# Altium PCB PCB1.PcbDoc (part 3 of 3)
Units mil, origin at the board's own origin, x right, y up, seen from the top; angles counter-clockwise.
Board outline 8600 x 11100 mil, 4 copper layers (CAPA1, GND, VCC, Capa2), stack 94.024 mil thick; 162 components, 68 nets, 413 pads, 138 vias.
Unrouted connection lines stored in the file: 33.
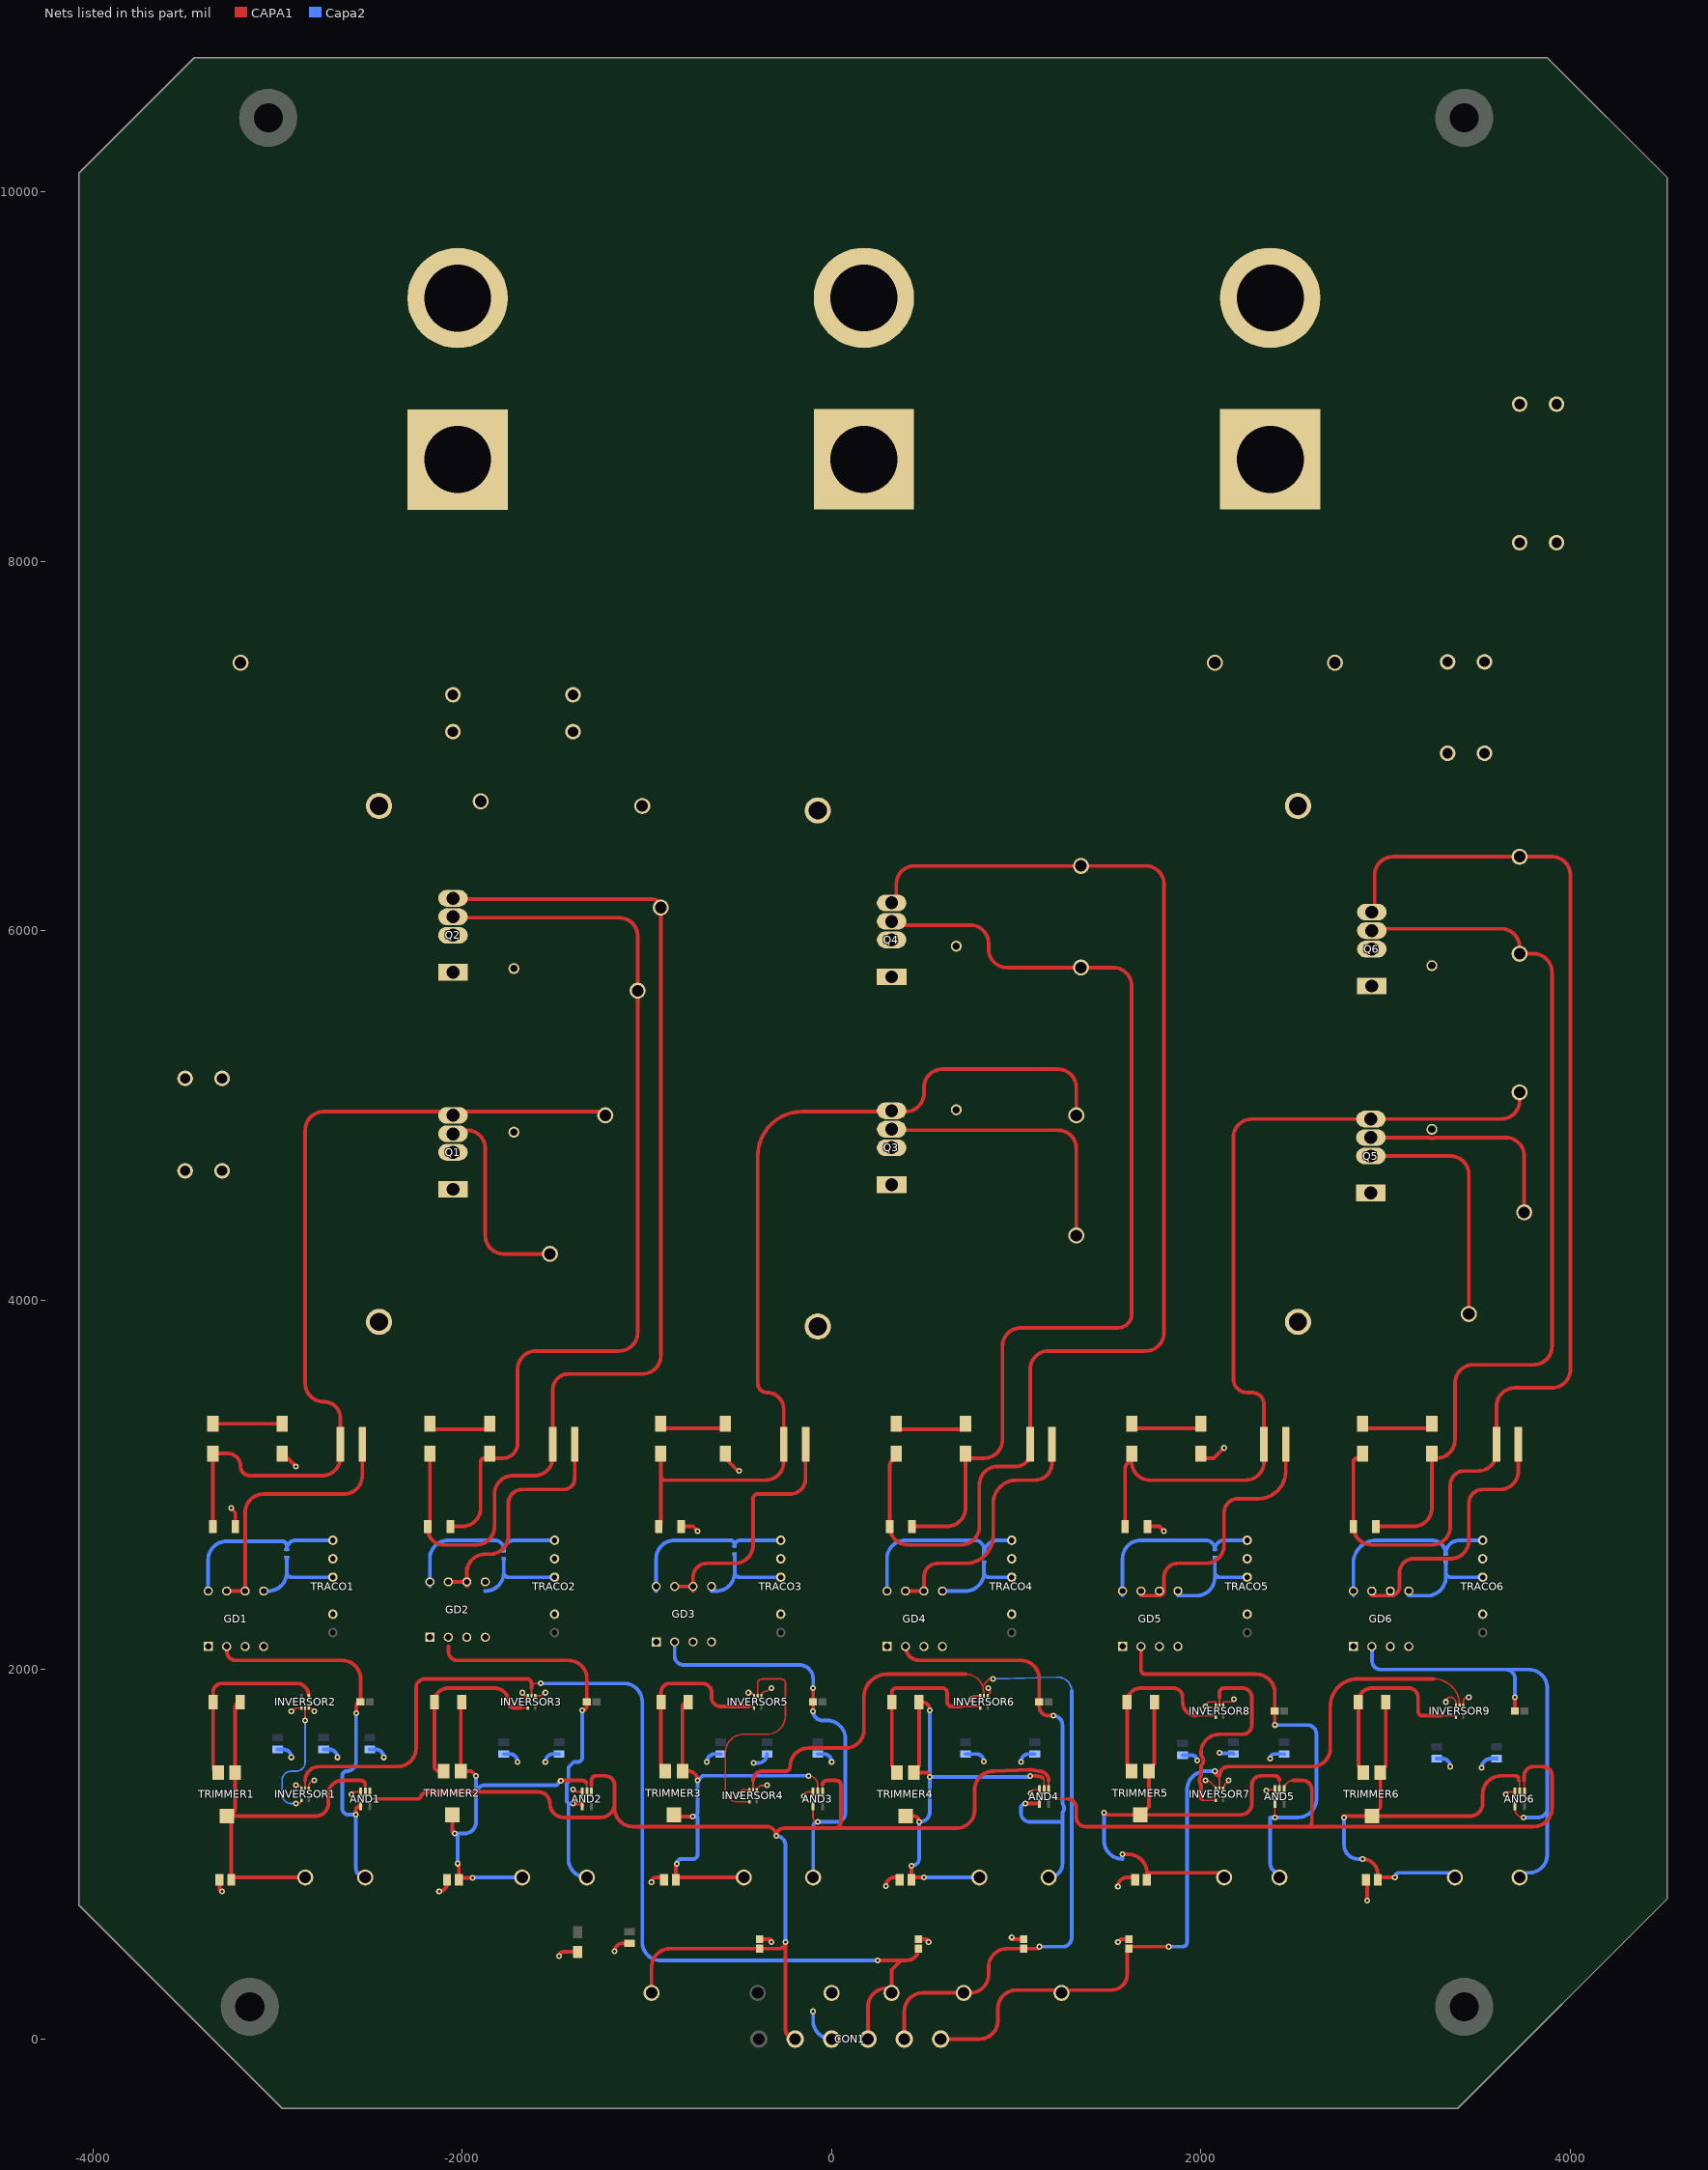
[diagram p4: the nets of this part, all layers, seen from the top]

## Via types
v1: diameter 32, hole 16, CAPA1 to Capa2, 138 vias

## Nets (pads, with @x,y where several pads share a name; then routed paths per layer and width w, separated by ;. In a path a pad name is that pad's centre, name@x,y a point inside that pad or via, vN(x,y) a via of type N, cw(c..) or ccw(c..) an arc to the next point about the centre after c; other vN are vias at no path point) (continued)
GND: AND1.3 AND2.3 AND3.3 AND4.3 AND5.3 AND6.3 CG1.1 CG2.1 CG3.1 CG4.2 CG5.2 CG6.1 CG7.1 CG10.1 CG12.1 CG13.1 CG14.2 CG15.2 CG16.1 CG17.1 CG20.1 CG21.1 CG22.1 CG23.2 CG24.2 CG25.1 CG26.1 Cin1.2 Cin2.2 CON1.3 GD1.1 GD1.3 GD1.4 GD2.1 GD2.3 GD2.4 GD3.1 GD3.3 GD3.4 GD4.1 GD4.3 GD4.4 GD5.1 GD5.3 GD5.4 GD6.1 GD6.3 GD6.4 INVERSOR1.1 INVERSOR1.3 INVERSOR2.1 INVERSOR2.3 INVERSOR3.1 INVERSOR3.3 INVERSOR4.1 INVERSOR4.3 INVERSOR5.1 INVERSOR5.3 INVERSOR6.1 INVERSOR6.3 INVERSOR7.1 INVERSOR7.3 INVERSOR8.1 INVERSOR8.3 INVERSOR9.1 INVERSOR9.3 Rin1.1 Rin2.1 Rin3.1 Rin4.1 TP36.1 TRACO1.2 TRACO2.2 TRACO3.2 TRACO4.2 TRACO5.2 TRACO6.2 | length 4319.2
  CAPA1 w9: v1(-2925,1775) -2918.78,1775 -2901.77,1792.01 INVERSOR2.1@-2869.69,1792.01 ; v1(-2900,1375) -2895.6,1370.6 -2878.85,1370.6 -2869.69,1361.44 INVERSOR1.3@-2869.69,1357.99 ; INVERSOR1.1@-2830.31,1357.99 -2830.31,1369.68 cw(c-2800,1369.68) v1(-2800,1400) ; INVERSOR2.3@-2830.31,1792.01 cw(c-2830.31,1759.88) -2807.6,1782.6 v1(-2800,1775) ; v1(-2600,1325) cw(c-2587.6,1325) -2587.6,1337.4 AND1.3@-2550.59,1337.4 ; v1(-1675,1875) ccw(c-1657.99,1875) -1657.99,1857.99 INVERSOR3.3@-1644.69,1857.99 INVERSOR3.3@-1643.28,1862.84 ; INVERSOR3.1@-1605.31,1857.99 -1573.23,1857.99 -1556.22,1875 v1(-1550,1875) ; v1(-1400,1350) -1393.78,1350 -1381.18,1337.4 AND2.3@-1350.59,1337.4 ; v1(-500,1325) cw(c-475,1325) -475,1350 INVERSOR4.3@-444.68,1350 INVERSOR4.3@-443.28,1354.85 ; v1(-450,1875) -445.6,1870.6 -428.85,1870.6 -419.68,1861.44 INVERSOR5.3@-419.68,1857.99 ; INVERSOR4.1@-405.32,1350 -405.32,1353.44 -387.49,1371.27 -353.73,1371.27 v1(-350,1375) ; INVERSOR5.1@-380.32,1857.99 cw(c-356.02,1857.99) -356.02,1882.29 -348.94,1882.29 -331.22,1900 v1(-325,1900) ; v1(-151.38,1314.24) cw(c-128.22,1314.24) -128.22,1337.4 AND3.3@-100.59,1337.4 ; v1(754.14,1839.74) cw(c772.39,1839.74) 772.39,1857.99 INVERSOR6.3@805.32,1857.99 INVERSOR6.3@806.72,1862.84 ; INVERSOR6.1@844.68,1857.99 846.09,1859.4 846.09,1862.84 858.82,1875.57 858.82,1883.03 848.2,1893.65 v1(848.2,1899.16) ; v1(1077.52,1330.02) cw(c1097.5,1330.02) 1097.5,1350 AND4.3@1124.41,1350 ; v1(2025,1400) 2029.4,1395.6 2046.15,1395.6 2080.32,1361.44 INVERSOR7.3@2080.32,1357.99 ; v1(2025,1800) cw(c2050,1800) 2050,1825 2075,1825 cw(c2075,1819.69) 2080.32,1819.69 INVERSOR8.3@2080.32,1807.99 2081.72,1812.84 INVERSOR8.3@2081.72,1817.34 ; INVERSOR8.1@2118.28,1817.34 2118.28,1812.84 INVERSOR8.1@2119.68,1807.99 2119.68,1819.69 cw(c2125,1819.69) 2125,1825 2164.4,1825 ccw(c2164.4,1839.74) v1(2179.14,1839.74) ; INVERSOR7.1@2119.68,1357.99 2119.68,1361.44 2129.14,1370.89 2129.14,1379.14 v1(2150,1400) ; v1(2353.66,1346.52) cw(c2357.14,1346.52) 2357.14,1350 AND5.3@2399.41,1350 ; v1(3325,1825) cw(c3350,1825) 3350,1850 cw(c3350,1819.69) 3380.32,1819.69 INVERSOR9.3@3380.32,1807.99 3381.72,1812.84 INVERSOR9.3@3381.72,1817.34 ; INVERSOR9.1@3418.28,1817.34 3418.28,1812.84 INVERSOR9.1@3419.68,1807.99 3419.68,1825.91 cw(c3443.78,1825.91) 3443.78,1850 v1(3450,1850) ; v1(3650.44,1325.22) cw(c3662.62,1325.22) 3662.62,1337.4 AND6.3@3699.41,1337.4
  CAPA1 w20: CG4.2@-3313.78,875 -3313.78,813.78 ccw(c-3300,813.78) v1(-3300,800) ; v1(-2125,800) ccw(c-2125,843.11) -2081.89,843.11 CG5.2@-2081.89,875 ; v1(-1475,450) cw(c-1453.15,450) -1453.15,471.85 Cin2.2@-1375,471.85 ; v1(-1175,475) cw(c-1131.89,475) -1131.89,518.11 Cin1.2@-1095,518.11 ; v1(-975,850) cw(c-950,850) -950,875 CG14.2@-906.89,875 ; Rin1.1@-390,540.59 -340.59,540.59 cw(c-340.59,525) v1(-325,525) ; v1(294.14,828.58) cw(c340.57,828.58) 340.57,875 CG15.2@368.11,875 ; Rin2.1@470,540.59 509.41,540.59 cw(c509.41,525) v1(525,525) ; v1(975,550) ccw(c984.41,550) 984.41,540.59 Rin3.1@1040,540.59 ; v1(1550,525) 1551.67,525 1567.26,540.59 Rin4.1@1610,540.59 ; v1(1550,825) cw(c1600,825) 1600,875 CG23.2@1643.11,875 ; CG24.2@2893.11,875 cw(c2893.11,868.11) 2900,868.11 v1(2900,750)
  Capa2 w20: CG1.1@-3000,1568.11 -2968.11,1568.11 cw(c-2968.11,1525) v1(-2925,1525) ; CG2.1@-2750,1568.11 -2718.11,1568.11 cw(c-2718.11,1525) v1(-2675,1525) ; CG6.1@-2500,1568.11 -2468.11,1568.11 cw(c-2468.11,1525) v1(-2425,1525) ; CG3.1@-1775,1543.11 -1743.11,1543.11 cw(c-1743.11,1500) v1(-1700,1500) ; v1(-1550,1500) cw(c-1506.89,1500) -1506.89,1543.11 CG7.1@-1475,1543.11 ; v1(-675,1500) cw(c-631.89,1500) -631.89,1543.11 CG10.1@-600,1543.11 ; v1(-423.01,1493.82) -399.29,1493.82 ccw(c-399.29,1543.11) CG12.1@-350,1543.11 ; v1(-100,150) -100,100 ccw(c0,100) CON1.3@0,0 ; CG16.1@-75,1543.11 -43.11,1543.11 cw(c-43.11,1500) v1(0,1500) ; CG13.1@725,1543.11 783.69,1543.11 cw(c783.69,1501.97) v1(824.83,1501.97) ; v1(1025,1500) cw(c1068.11,1500) 1068.11,1543.11 CG17.1@1100,1543.11 ; CG20.1@1900,1536.22 1949.6,1536.22 cw(c1949.6,1506.77) v1(1979.05,1506.77) ; v1(2100,1550) 2102.3,1547.7 2170.41,1547.7 CG21.1@2175,1543.11 ; v1(2375.17,1519.07) cw(c2399.21,1519.07) 2399.21,1543.11 CG25.1@2450,1543.11 ; CG22.1@3275,1518.11 3306.89,1518.11 cw(c3306.89,1475) v1(3350,1475) ; v1(3519.87,1468.35) cw(c3569.63,1468.35) 3569.63,1518.11 CG26.1@3600,1518.11
GND_G1: DZ2.2 Q1.3 R1.1 TP2.1 TRACO1.5 | length 1317
  CAPA1 w20: v1(-3250,2875) -3250,2871.75 -3227.95,2849.71 R1.1@-3227.95,2775 ; DZ2.2@-2975,3169.29 -2969.29,3169.29 v1(-2900,3100) ; Q1.3@-2045,4920 -1975,4920 cw(c-1975,4820) -1875,4820 -1875,4350 ccw(c-1775,4350) -1775,4250 TP2.1@-1525,4250
GND_G3: DZ6.2 Q3.3 R3.1 TP8.1 TRACO3.5 | length 1705.1
  CAPA1 w20: R3.1@-813.98,2775 -750,2775 v1(-725,2750) ; DZ6.2@-575,3144.29 -505.71,3075 v1(-500,3075) ; Q3.3@350,4920 1225,4920 cw(c1225,4820) 1325,4820 TP8.1@1325,4350
GND_G5: DZ11.2 Q5.3 R5.1 TP14.1 TRACO5.5 | length 1460.2
  CAPA1 w20: R5.1@1711.02,2775 1775,2775 v1(1800,2750) ; DZ11.2@2000,3144.29 2069.29,3144.29 v1(2125,3200) ; Q5.3@2900,4880 Q5.3@2920,4880 3229.45,4880 cw(c3229.39,4860) 3235.46,4879.06 ccw(c3250,4924.17) 3264.55,4879.06 cw(c3270.61,4860) 3270.55,4880 3650,4880 cw(c3650,4780) 3750,4780 TP14.1@3750,4475
NetAND1_1: AND1.1 AND2.1 AND3.1 AND4.1 AND5.1 AND6.1 CON1.2 Rin1.2 TP32.1 | length 10910.1
  CAPA1 w9: AND1.1@-2499.41,1337.4 -2499.41,1324.41 ccw(c-2475,1324.41) -2475,1300 ; -1300,1375 -1299.41,1375 AND2.1@-1299.41,1337.4 ; AND3.1@-49.41,1337.4 -49.41,1375.59 ; 1175,1400 1175,1350 AND4.1@1175.59,1350 1175.59,1349.41 ccw(c1225,1349.41) 1225,1300 1275,1300 ; AND5.1@2450.59,1350 cw(c2500.59,1350) 2500.59,1400
  CAPA1 w9.02: 3750,1400 3750.59,1400 AND6.1@3750.59,1337.4
  CAPA1 w20: -2475,1300 -2241.4,1300 -2236.72,1300 -2232.52,1302.08 ccw(c-2241.4,1320) -2222.67,1312.99 cw(c-2187.6,1300) -2187.6,1337.4 -1587.4,1337.4 cw(c-1587.4,1275) -1525,1275 ccw(c-1450,1275) -1450,1200 -1250,1200 ccw(c-1250,1275) -1175,1275 ; -1300,1375 -1300,1400 cw(c-1275,1400) -1275,1425 -1225,1425 cw(c-1225,1375) -1175,1375 -1175,1275 ; TP32.1@-975,275 -975,389.41 cw(c-875,389.41) -875,489.41 Rin1.2@-390,489.41 -285.59,489.41 ccw(c-285.59,525) v1(-250,525) -250,53.15 ccw(c-196.85,53.15) CON1.2@-196.85,0 ; -49.41,1375.59 cw(c-25,1375.59) -25,1400 25,1400 cw(c25,1375) 50,1375 50,1175.04 cw(c16.09,1175.04) 16.09,1141.13 ; 1175,1400 ccw(c1125,1400) 1125,1450 cw(c1125,1470) 1121.11,1450.38 1081.6,1458.23 ccw(c1075,1425) 1073.49,1458.84 875.89,1450.02 cw(c875,1470) 875,1450 ccw(c875,1350) 775,1350 775,1241.13 cw(c675,1241.13) 675,1141.13 -258.87,1141.13 ccw(c-258.87,1100) v1(-300,1100) ccw(c-350,1100) -350,1150 -1075,1150 cw(c-1075,1250) -1175,1250 -1175,1275 ; 1275,1300 cw(c1275,1250) 1325,1250 1325,1200 ccw(c1375,1200) 1375,1150 2575,1150 ; 2500.59,1400 2550,1400 cw(c2550,1350) 2600,1350 2600,1175 cw(c2575,1175) 2575,1150 ; 3750,1400 3750,1425 cw(c3800,1425) 3800,1475 3850,1475 cw(c3850,1425) 3900,1425 3900,1250 cw(c3800,1250) 3800,1150 2969.48,1150 ccw(c2969.54,1130) 2966.85,1149.82 cw(c2964.37,1167.52) 2964.37,1149.65 2885.63,1149.65 cw(c2885.63,1167.52) 2883.15,1149.82 ccw(c2880.46,1130) 2880.52,1150 2575,1150
  Capa2 w20: v1(-300,1100) cw(c-300,1050) -250,1050 v1(-250,525)
NetAND1_2: AND1.2 CG4.1 DG1.2 TP19.1 TRIMMER1.2 TRIMMER1.3 | length 2340
  CAPA1 w9: AND1.2@-2525,1337.4 -2525,1375
  CAPA1 w20: DG1.2@-3201.18,1825 ccw(c-3201.18,1797.44) -3228.74,1797.44 TRIMMER1.3@-3228.74,1443.11 -3228.74,1253.15 cw(c-3275,1253.15) TRIMMER1.2@-3275,1206.89 ; TP19.1@-2850,875 -3250,875 -3250,1181.89 ccw(c-3275,1181.89) TRIMMER1.2@-3275,1206.89 ; -2525,1375 ccw(c-2550,1375) -2550,1400 -2650,1400 ccw(c-2650,1325) -2725,1325 -2725,1275 cw(c-2793.11,1275) -2793.11,1206.89 TRIMMER1.2@-3275,1206.89
NetAND1_4: AND1.4 GD1.2 RG1.1 TP20.1 | length 2158.3
  CAPA1 w20: GD1.2@-3275,2125 -3275,2100 ccw(c-3225,2100) -3225,2050 -2650,2050 cw(c-2650,1950) -2550,1950 -2550,1826.18 cw(c-2551.18,1826.18) RG1.1@-2551.18,1825 ccw(c-2551.18,1803.6) -2572.59,1803.6 v1(-2572.59,1763.11) ; v1(-2575.43,1214.56) -2575.43,1237.76 cw(c-2550.59,1237.76) AND1.4@-2550.59,1262.6 ; TP20.1@-2550.59,900.59 ccw(c-2525,900.59) TP20.1@-2525,875
  Capa2 w20: v1(-2572.59,1763.11) ccw(c-2572.59,1760.7) -2575,1760.7 -2575,1500 cw(c-2625,1500) -2625,1450 ccw(c-2625,1425) -2650,1425 -2650,1250 ccw(c-2614.56,1250) -2614.56,1214.56 v1(-2575.43,1214.56) -2575.43,925.43 ccw(c-2525,925.43) TP20.1@-2525,875
NetAND2_2: AND2.2 CG5.1 DG2.2 TP21.1 TRIMMER2.2 TRIMMER2.3 | length 2277.6
  CAPA1 w9: -1327.87,1391.02 -1327.87,1386.6 ccw(c-1318.87,1386.6) -1327.67,1384.71 -1325.2,1373.16 cw(c-1334,1371.27) -1325,1371.27 AND2.2@-1325,1337.4
  CAPA1 w20: TRIMMER2.2@-2053.74,1213.78 -2053.74,1125.81 ccw(c-2041.17,1125.81) v1(-2041.17,1113.24) ; v1(-2025,950) cw(c-2025,943.11) -2018.11,943.11 -2018.11,875 ccw(c-2015.01,875) -2015.01,871.9 v1(-1944.36,871.9) ; DG2.2@-2002.36,1825 ccw(c-2002.36,1819.88) -2007.48,1819.88 TRIMMER2.3@-2007.48,1450 -1950,1450 v1(-1925,1425) ; v1(-1466.25,1397.95) cw(c-1464.2,1397.95) -1464.2,1400 -1350,1400 cw(c-1350,1375) -1327.87,1386.64 -1327.87,1391.02
  Capa2 w20: v1(-2025,950) -2025,1097.07 ccw(c-2041.17,1097.07) v1(-2041.17,1113.24) -1986.76,1113.24 ccw(c-1986.76,1175) -1925,1175 v1(-1925,1425) ; v1(-1944.36,871.9) cw(c-1941.26,871.9) -1941.26,875 TP21.1@-1675,875 ; -1925,1325 cw(c-1875,1325) -1875,1375 -1489.2,1375 v1(-1466.25,1397.95)
NetAND2_4: AND2.4 GD2.2 RG2.1 TP22.1 | length 2142.9
  CAPA1 w20: -2075,2125 -2075,2100 ccw(c-2025,2100) -2025,2050 -1425,2050 cw(c-1425,1950) -1325,1950 RG2.1@-1325,1825 -1325,1805.02 cw(c-1350.34,1805.02) v1(-1350.34,1779.68) ; v1(-1400,1275) -1362.99,1275 cw(c-1362.99,1262.6) AND2.4@-1350.59,1262.6
  Capa2 w20: v1(-1400,1275) -1425,1275 ; v1(-1350.34,1779.68) -1350.34,1524.66 cw(c-1375,1524.66) -1375,1500 -1395.71,1500 -1410.36,1485.36 -1425,1470.71 -1425,1391.29 -1433.87,1382.42 -1433.87,1283.87 -1425,1275 ; TP22.1@-1325,875 cw(c-1325,975) -1425,975 -1425,1275
NetAND3_2: AND3.2 CG14.1 DG3.2 TP23.1 TRIMMER3.2 TRIMMER3.3 | length 2364.9
  CAPA1 w9: v1(-125,1425) cw(c-125,1375) -75,1375 AND3.2@-75,1337.4
  CAPA1 w20: TRIMMER3.2@-853.74,1213.78 ccw(c-844.14,1213.78) -844.14,1204.17 v1(-751.1,1204.17) ; v1(-838.81,948.23) ccw(c-838.81,943.93) -843.11,943.93 -843.11,875 TP23.1@-475,875 ; DG3.2@-776.18,1825 ccw(c-776.18,1793.7) -807.48,1793.7 TRIMMER3.3@-807.48,1450 -775,1450 cw(c-775,1400) v1(-725,1400)
  Capa2 w20: v1(-838.81,948.23) cw(c-812.05,948.23) -812.05,975 -750,975 ccw(c-750,1000) -725,1000 -725,1200 ccw(c-729.17,1200) -729.17,1204.17 v1(-751.1,1204.17) ccw(c-751.1,1230.28) -725,1230.28 v1(-725,1400) -700,1425 v1(-125,1425)
NetAND3_4: AND3.4 GD3.2 RG5.1 TP24.1 | length 2303.3
  CAPA1 w9: AND3.4@-100.59,1262.6 -100.59,1200.59 ccw(c-75,1200.59) v1(-75,1175)
  CAPA1 w20: v1(-100,1775) -100,1823.82 ccw(c-101.18,1823.82) RG5.1@-101.18,1825 ccw(c-101.18,1826.18) -100,1826.18 v1(-100,1900)
  Capa2 w20: -850,2125 -850,2075 ccw(c-800,2075) -800,2025 -175,2025 cw(c-175,1950) -100,1950 v1(-100,1900) ; TP24.1@-100,875 -100,1150 cw(c-75,1150) v1(-75,1175) 25,1175 ccw(c25,1225) 75,1225 75,1625 ccw(c-25,1625) -25,1725 -50,1725 cw(c-50,1775) v1(-100,1775)
NetAND4_2: AND4.2 CG15.1 DG4.2 TP25.1 TRIMMER4.2 TRIMMER4.3 | length 2684.9
  CAPA1 w9.02: 1140.65,1415.65 cw(c1140.65,1406.29) 1150,1406.29 AND4.2@1150,1350
  CAPA1 w20: TRIMMER4.2@400,1206.89 443.11,1206.89 cw(c443.11,1175) v1(475,1175) ; v1(432.71,937.94) ccw(c432.71,937.12) 431.89,937.12 431.89,875 v1(500,875) ; v1(531.95,1419.7) ccw(c508.54,1419.7) 508.54,1443.11 TRIMMER4.3@446.26,1443.11 446.26,1450.98 473.82,1478.54 DG4.2@473.82,1825 487.15,1825 cw(c487.15,1779.88) v1(532.27,1779.88) ; v1(1075,1425) 1103.85,1425 cw(c1103.85,1405) 1107.74,1424.62 1115.67,1423.04 ccw(c1125,1470) 1125,1422.13 cw(c1125,1400) 1140.65,1415.65
  Capa2 w20: v1(432.71,937.94) ccw(c432.71,980.23) 475,980.23 v1(475,1175) ccw(c475,1231.95) 531.95,1231.95 v1(531.95,1419.7) ; v1(500,875) TP25.1@800,875 ; v1(532.27,1779.88) 531.95,1779.88 v1(531.95,1419.7) ; v1(1075,1425) cw(c1069.7,1425) 1069.7,1419.7 v1(531.95,1419.7)
NetAND4_4: AND4.4 GD4.2 RG6.1 TP26.1 | length 2420.2
  CAPA1 w20: GD4.2@400,2125 ccw(c475,2125) 475,2050 1023.82,2050 cw(c1023.82,1950) 1123.82,1950 RG6.1@1123.82,1825 1123.82,1801.18 ccw(c1175,1801.18) 1175,1750 v1(1200,1750) ; v1(1050,1275) 1124.41,1275 AND4.4@1124.41,1275.2
  Capa2 w20: v1(1050,1275) ccw(c1050,1250) 1025,1250 1025,1225 ccw(c1075,1225) 1075,1175 1250,1175 ; TP26.1@1175,875 ccw(c1175,950) 1250,950 1250,1175 ; v1(1200,1750) cw(c1200,1700) 1250,1700 1250,1279.56 ccw(c1270,1279.62) 1253.26,1268.67 cw(c1225,1250) 1253.27,1231.34 ccw(c1270,1220.38) 1250,1220.44 1250,1175
NetAND5_2: AND5.2 CG23.1 DG5.2 TP27.1 TRIMMER5.2 TRIMMER5.3 | length 2766.2
  CAPA1 w9: AND5.2@2425,1350 2425,1400
  CAPA1 w20: v1(1475,1225) ccw(c1486.22,1225) 1486.22,1213.78 TRIMMER5.2@1671.26,1213.78 ; v1(1575,1000) 1606.89,1000 cw(c1606.89,900) 1706.89,900 TP27.1@2125,900 ; DG5.2@1747.64,1825 1747.64,1487.99 1717.52,1457.87 TRIMMER5.3@1717.52,1450 1717.52,1260.04 TRIMMER5.2@1671.26,1213.78 ; 2425,1400 ccw(c2400,1400) 2400,1425 2325,1425 ccw(c2325,1375) 2275,1375 2275,1275 cw(c2213.78,1275) 2213.78,1213.78 TRIMMER5.2@1671.26,1213.78
  Capa2 w20: v1(1475,1225) 1475,1075 ccw(c1575,1075) 1575,975 v1(1575,1000)
NetAND5_4: AND5.4 GD5.2 RG9.1 TP28.1 | length 2386.3
  CAPA1 w9.02: AND5.4@2399.41,1275.2 2399.41,1200 v1(2400,1200)
  CAPA1 w20: 1675,2100 1675,2000 ccw(c1700,2000) 1700,1975 2299.41,1975 cw(c2299.41,1875) 2399.41,1875 RG9.1@2399.41,1775 2399.41,1700 v1(2400,1700)
  Capa2 w20: v1(2400,1700) 2575,1700 cw(c2575,1650) 2625,1650 2625,1300 cw(c2525,1300) 2525,1200 v1(2400,1200) 2375,1200 2375,950 ccw(c2425,950) TP28.1@2425,900
NetAND6_2: AND6.2 CG24.1 DG6.2 TP29.1 TRIMMER6.2 TRIMMER6.3 | length 2699.2
  CAPA1 w9: 3722.14,1399.99 cw(c3716,1393.41) 3725,1393.41 AND6.2@3725,1337.4
  CAPA1 w20: v1@2774.03,1206.89 cw(c2750,1200) v1(2775,1200) ; v1@2775,1206.89 TRIMMER6.2@2925,1206.89 ; v1(2875,975) cw(c2875,893.11) 2956.89,893.11 2956.89,875 v1(3050,875) ; DG6.2@3000,1825 3000,1479.72 2971.26,1450.98 TRIMMER6.3@2971.26,1443.11 2971.26,1253.15 TRIMMER6.2@2925,1206.89 ; 3722.13,1400 3719.28,1410.32 ccw(c3700,1405) 3700,1425 3625,1425 ccw(c3625,1325) 3525,1325 3525,1275 cw(c3456.89,1275) 3456.89,1206.89 TRIMMER6.2@2925,1206.89
  Capa2 w20: v1(2775,1200) 2775,1050 ccw(c2850,1050) 2850,975 v1(2875,975) ; v1(3050,875) cw(c3075,875) 3075,900 TP29.1@3375,900
NetAND6_4: AND6.4 GD6.2 RG10.1 TP30.1 | length 2694.3
  CAPA1 w9: AND6.4@3699.41,1262.6 3699.41,1246.2 ccw(c3746.11,1246.2) v1(3746.11,1199.5)
  CAPA1 w20: RG10.1@3699.41,1775 3700,1775 v1(3700,1850)
  Capa2 w20: 2925,2100 2925,2050 ccw(c2975,2050) 2975,2000 3775,2000 cw(c3775,1900) 3875,1900 3875,1250 ; 3650,2000 cw(c3650,1950) 3700,1950 v1(3700,1850) ; TP30.1@3725,900 3775,900 ccw(c3775,1000) 3875,1000 3875,1250 ; v1(3746.11,1199.5) 3824.5,1199.5 ccw(c3824.5,1250) 3875,1250
NetC1_1: C1.1 C2.1 C3.1 Csnu1.2 Csnu2.2 Csnu3.2 J5.1 J6.1 Q1.1 Q3.1 Q5.1 TP12.1 | length 1.5
  CAPA1 w100: C1.1@-2025,8375 cw(c-2024.02,8375) C1.1@-2024.02,8375.98
NetCG8_1: CG8.1 GD1.8 TRACO1.6 | length 964.3
  Capa2 w20: GD1.8@-3375,2425 -3375,2594.72 cw(c-3275,2594.72) -3275,2694.72 -2991.57,2694.72 -2975,2694.72 cw(c-2975,2669.72) -2950,2669.72 CG8.1@-2950,2650 cw(c-2900,2650) -2922.36,2694.72 cw(c-2900,2650) -2900,2700 TRACO1.6@-2700,2700
NetCG8_2: CG8.2 GD1.5 TRACO1.4 | length 528
  Capa2 w20: GD1.5@-3075,2425 -3050,2425 ccw(c-3050,2525) -2950,2525 ; CG8.2@-2950,2606.69 -2950,2525 ; TRACO1.4@-2700,2500 -2925,2500 cw(c-2925,2525) -2950,2525
NetCG9_1: CG9.1 GD2.8 TRACO2.6 | length 1124.7
  Capa2 w20: -2175,2625 -2175,2450 -2175,2600 cw(c-2075,2600) -2075,2700 -1825,2700 cw(c-1825,2650) -1775,2650 CG9.1@-1775,2643.31 cw(c-1718.31,2643.31) -1718.31,2700 TRACO2.6@-1500,2700
NetCG9_2: CG9.2 GD2.5 TRACO2.4 | length 521.3
  Capa2 w20: -1875,2425 ccw(c-1875,2525) -1775,2525 ; CG9.2@-1775,2600 -1775,2525 ; TRACO2.4@-1500,2500 -1750,2500 cw(c-1750,2525) -1775,2525
NetCG18_1: CG18.1 GD3.8 TRACO3.6 | length 946.1
  Capa2 w20: -950,2425 -950,2600 cw(c-850,2600) -850,2700 -550,2700 cw(c-550,2675) -525,2675 CG18.1@-525,2668.31 cw(c-493.31,2668.31) -493.31,2700 TRACO3.6@-275,2700
NetCG18_2: CG18.2 GD3.5 TRACO3.4 | length 546.3
  Capa2 w20: -650,2425 -625,2425 ccw(c-625,2525) -525,2525 ; CG18.2@-525,2625 -525,2525 ; TRACO3.4@-275,2500 -500,2500 cw(c-500,2525) -525,2525
NetCG19_1: CG19.1 GD4.8 TRACO4.6 | length 1003.4
  Capa2 w20: GD4.8@300,2425 300,2600 cw(c400,2600) 400,2700 775,2700 cw(c775,2650) 825,2650 CG19.1@825,2625 cw(c900,2625) 900,2700 TRACO4.6@975,2700
NetCG19_2: CG19.2 GD4.5 TRACO4.4 | length 503
  Capa2 w20: GD4.5@600,2425 725,2425 ccw(c725,2525) 825,2525 ; CG19.2@825,2581.69 825,2525 ; TRACO4.4@975,2500 850,2500 cw(c850,2525) 825,2525
NetCG27_1: CG27.1 GD5.8 TRACO5.6 | length 989.2
  Capa2 w20: 1575,2400 1575,2600 cw(c1675,2600) 1675,2700 2025,2700 cw(c2025,2650) CG27.1@2075,2650 cw(c2125,2650) 2125,2700 TRACO5.6@2250,2700
NetCG27_2: CG27.2 GD5.5 TRACO5.4 | length 553
  Capa2 w20: 1875,2400 1975,2400 ccw(c1975,2500) 2075,2500 2075,2525 ; CG27.2@2075,2606.69 2075,2525 ; TRACO5.4@2250,2500 2100,2500 cw(c2100,2525) 2075,2525
NetCG28_1: CG28.1 GD6.8 TRACO6.6 | length 1032
  Capa2 w20: 2825,2400 2825,2575 cw(c2950,2575) 2950,2700 3250,2700 cw(c3250,2625) CG28.1@3325,2625 cw(c3400,2625) 3400,2700 TRACO6.6@3525,2700
NetCG28_2: CG28.2 GD6.5 TRACO6.4 | length 553
  Capa2 w20: 3125,2400 3225,2400 ccw(c3225,2500) 3325,2500 3325,2525 ; CG28.2@3325,2581.69 3325,2525 ; TRACO6.4@3525,2500 3350,2500 cw(c3350,2525) 3325,2525
NetCON1_4: CON1.4 INVERSOR1.2 INVERSOR3.2 Rin2.2 TP33.1 | length 5892.8
  CAPA1 w9: INVERSOR1.2@-2850,1357.99 -2850,1400 ; INVERSOR3.2@-1625,1857.99 -1625,1900 cw(c-1600,1900) -1600,1925 v1(-1575,1925)
  CAPA1 w20: -2850,1400 cw(c-2775,1400) -2775,1475 -2350,1475 ccw(c-2350,1575) -2250,1575 -2250,1900 cw(c-2200,1900) -2200,1950 -1650,1950 cw(c-1650,1925) -1625,1925 -1625,1900 ; CON1.4@196.85,0 196.85,175 cw(c296.85,175) 296.85,275 325,275 325,375 375,425 ; v1(250,425) 375,425 ; Rin2.2@470,489.41 cw(c405.59,489.41) 424.17,427.74 ccw(c424.17,328.56) 401.03,425 375,425
  Capa2 w20: v1(-1575,1925) -1125,1925 cw(c-1125,1825) -1025,1825 -1025,525 ccw(c-925,525) -925,425 v1(250,425)
NetCON1_5: CON1.5 INVERSOR4.2 INVERSOR6.2 Rin3.2 TP34.1 | length 4960.1
  CAPA1 w9: INVERSOR4.2@-425,1350 -425,1400 ; 725,1975 cw(c725,1875) 819.83,1906.75 ; INVERSOR6.2@825,1857.99 825,1875 ccw(c725,1875) 824.72,1882.52 819.83,1887.41 819.83,1910.92 829.38,1920.48 829.38,1925.1 839.64,1935.36 854.29,1950 v1(875,1950)
  CAPA1 w20: -425,1400 cw(c-375,1400) -375,1450 -250,1450 ccw(c-250,1475) -225,1475 cw(c-125,1475) -125,1575 75,1575 ccw(c75,1675) 175,1675 175,1850 cw(c300,1850) 300,1975 725,1975 ; CON1.5@393.7,0 393.7,150 cw(c493.7,150) 493.7,250 TP34.1@715,250 750,250 ccw(c750,350) 850,350 850,389.41 cw(c950,389.41) 950,489.41 Rin3.2@1040,489.41 1114.41,489.41 ccw(c1114.41,500) v1(1125,500)
  Capa2 w9: v1(875,1950) 1220.68,1958.61 1220.79,1958.62 cw(c1224.54,1883.26) 1300,1883.26
  Capa2 w20: v1(1125,500) 1250,500 ccw(c1250,550) 1300,550 1300,1883.26
NetCON1_6: CON1.6 INVERSOR7.2 INVERSOR9.2 Rin4.2 TP35.1 | length 4633.2
  CAPA1 w9: INVERSOR7.2@2100,1357.99 2100,1425 ; 3257.99,1950 cw(c3257.99,1807.99) INVERSOR9.2@3400,1807.99
  CAPA1 w20: CON1.6@590.55,0 800,0 ccw(c800,100) 900,100 900,165 cw(c1000,165) 1000,265 1245,265 1515,265 ccw(c1515,350) 1600,350 1600,479.41 cw(c1610,479.41) Rin4.2@1610,489.41 cw(c1620.59,489.41) 1620.59,500 v1(1825,500) ; v1(2075,1450) ccw(c2100,1450) 2100,1425 cw(c2150,1425) 2150,1475 2600,1475 ccw(c2600,1575) 2700,1575 2700,1800 cw(c2850,1800) 2850,1950 3257.99,1950
  Capa2 w20: v1(1825,500) 1900,500 ccw(c1900,525) 1925,525 1925,1350 cw(c2025,1350) 2025,1450 v1(2075,1450)
NetDG1_1: DG1.1 INVERSOR2.4 TRIMMER1.1 | length 1033.4
  CAPA1 w20: TRIMMER1.1@-3321.26,1443.11 cw(c-3321.26,1470.67) -3348.82,1470.67 DG1.1@-3348.82,1825 -3348.82,1876.18 cw(c-3300,1876.18) -3300,1925 -2897.32,1925 cw(c-2897.32,1857.99) INVERSOR2.4@-2830.31,1857.99
NetDG2_1: DG2.1 INVERSOR3.4 TRIMMER2.1 | length 1024
  CAPA1 w9: -1682.99,1792.01 INVERSOR3.4@-1644.69,1792.01
  CAPA1 w20: TRIMMER2.1@-2100,1450 -2125,1450 cw(c-2125,1475) -2150,1475 DG2.1@-2150,1825 cw(c-2075,1825) -2075,1900 -1825,1900 cw(c-1825,1825) -1750,1825 ccw(c-1717.01,1825) -1717.01,1792.01 -1682.99,1792.01
NetDG3_1: DG3.1 INVERSOR5.4 TRIMMER3.1 | length 1058.4
  CAPA1 w9: -450,1800 -427.68,1800 cw(c-427.68,1792.01) INVERSOR5.4@-419.68,1792.01
  CAPA1 w20: TRIMMER3.1@-900,1450 cw(c-900,1473.82) -923.82,1473.82 DG3.1@-923.82,1825 -923.82,1876.18 cw(c-875,1876.18) -875,1925 -700,1925 cw(c-700,1875) -650,1875 -650,1850 ccw(c-600,1850) -600,1800 -450,1800
NetDG4_1: DG4.1 INVERSOR6.4 TRIMMER4.1 | length 1020.3
  CAPA1 w9: 700,1800 797.32,1800 cw(c797.32,1792.01) INVERSOR6.4@805.32,1792.01
  CAPA1 w20: TRIMMER4.1@353.74,1443.11 353.74,1450.98 326.18,1478.54 DG4.1@326.18,1825 326.18,1876.18 cw(c350,1876.18) 350,1900 600,1900 cw(c600,1875) 625,1875 625,1825 ccw(c650,1825) 650,1800 700,1800
NetDG5_1: DG5.1 INVERSOR8.4 TRIMMER5.1 | length 1009.4
  CAPA1 w9: 1975,1750 2072.32,1750 cw(c2072.32,1742.01) INVERSOR8.4@2080.32,1742.01
  CAPA1 w20: TRIMMER5.1@1625,1450 1625,1457.87 1600,1482.87 DG5.1@1600,1825 cw(c1675,1825) 1675,1900 1850,1900 cw(c1850,1850) 1900,1850 1900,1825 ccw(c1975,1825) 1975,1750
NetDG6_1: DG6.1 INVERSOR9.4 TRIMMER6.1 | length 1087
  CAPA1 w9: 3300,1750 3372.32,1750 cw(c3372.32,1742.01) INVERSOR9.4@3380.32,1742.01
  CAPA1 w20: TRIMMER6.1@2878.74,1443.11 2878.74,1450.98 2852.36,1477.36 DG6.1@2852.36,1825 2852.36,1827.36 cw(c2925,1827.36) 2925,1900 3125,1900 cw(c3125,1850) 3175,1850 3175,1775 ccw(c3200,1775) 3200,1750 3300,1750
NetDZ1_1: DZ1.1 DZ2.1 | length 375
  CAPA1 w20: DZ1.1@-3350,3330.71 DZ2.1@-2975,3330.71
NetDZ1_2: DZ1.2 Q1.4 R1.2 RG3.2 TP1.1 | length 4782.9
  CAPA1 w20: R1.2@-3350,2775 DZ1.2@-3350,3169.29 -3269.29,3169.29 cw(c-3269.29,3100) -3200,3100 ccw(c-3150,3100) -3150,3050 -2759.06,3050 ccw(c-2759.06,3150) -2659.06,3150 -2659.06,3250 -2659.06,3359.06 ccw(c-2750,3359.06) -2750,3450 cw(c-2750,3550) -2850,3550 -2850,4920 cw(c-2750,4920) -2750,5020 -2045,5020 -1245,5020 cw(c-1245,5000) TP1.1@-1225,5000
NetDZ3_1: DZ3.1 DZ4.1 | length 329.7
  CAPA1 w20: DZ3.1@-2175,3305.71 -2169.29,3300 -1855.71,3300 DZ4.1@-1850,3305.71
NetDZ3_2: DZ3.2 Q2.4 R2.2 RG4.2 TP3.1 | length 6077.6
  CAPA1 w20: DZ3.2@-2175,3144.29 -2175,2786.02 cw(c-2186.02,2786.02) R2.2@-2186.02,2775 -2186.02,2761.02 ccw(c-2100,2761.02) -2100,2675 -1925,2675 ccw(c-1925,2775) -1825,2775 -1825,2950 cw(c-1725,2950) -1725,3050 -1609.06,3050 ccw(c-1609.06,3150) -1509.06,3150 -1509.06,3250 -1509.06,3515.94 cw(c-1425,3515.94) -1425,3600 -1025,3600 ccw(c-1025,3700) -925,3700 TP3.1@-925,6125 ccw(c-970,6125) -970,6170 Q2.4@-2035,6170
NetDZ4_2: DZ4.2 Q2.3 R2.1 TP4.1 | length 5079.3
  CAPA1 w20: R2.1@-2063.98,2775 -2000,2775 ccw(c-2000,2875) -1900,2875 -1900,3125 cw(c-1880.71,3125) -1896.51,3136.06 -1891.77,3140.8 cw(c-1880.71,3125) -1880.71,3144.29 -1850,3144.29 -1780.71,3144.29 ccw(c-1780.71,3225) -1700,3225 -1700,3625 cw(c-1600,3625) -1600,3725 -1150,3725 ccw(c-1150,3825) -1050,3825 TP4.1@-1050,5675 -1050,5970 ccw(c-1150,5970) -1150,6070 Q2.3@-2035,6070
NetDZ5_1: DZ5.1 DZ6.1 | length 350
  CAPA1 w20: DZ5.1@-925,3305.71 DZ6.1@-575,3305.71
NetDZ5_2: DZ5.2 Q3.4 R3.2 RG7.2 TP7.1 | length 5059.4
  CAPA1 w20: R3.2@-936.02,2775 -925.35,2786.02 -925.18,2786.02 -925,2786.2 -925,3050 ; DZ5.2@-925,3144.29 -925,3050 ; TP7.1@1325,5000 1325,5150 ccw(c1225,5150) 1225,5250 600,5250 ccw(c600,5150) 500,5150 500,5120 cw(c400,5120) 400,5020 350,5020 -159.06,5020 ccw(c-159.06,4779.06) -400,4779.06 -400,3575 -400,3550 ccw(c-350,3550) -350,3500 cw(c-350,3409.06) -259.06,3409.06 -259.06,3250 -259.06,3125 cw(c-359.06,3125) -359.06,3025 -900,3025 cw(c-900,3050) -925,3050
NetDZ7_1: DZ7.1 DZ8.1 | length 378.3
  CAPA1 w20: DZ7.1@350,3300 719.29,3300 ccw(c719.29,3305.71) DZ8.1@725,3305.71
NetDZ7_2: DZ7.2 Q4.4 R4.2 RG8.2 TP9.1 | length 6982.5
  CAPA1 w20: DZ7.2@350,3138.58 ccw(c350,3102.56) 313.98,3102.56 R4.2@313.98,2775 ccw(c413.98,2775) 413.98,2675 700,2675 ccw(c700,2775) 800,2775 800,3000 cw(c900,3000) 900,3100 1000,3100 ccw(c1000,3175) 1075,3175 1075,3250 1075,3625 cw(c1175,3625) 1175,3725 1700,3725 ccw(c1700,3825) 1800,3825 1800,6250 ccw(c1700,6250) 1700,6350 TP9.1@1350,6350 450,6350 ccw(c450,6250) 350,6250 Q4.4@350,6130
NetDZ8_2: DZ8.2 Q4.3 R4.1 TP10.1 | length 5429.3
  CAPA1 w20: Q4.3@350,6030 750,6030 cw(c750,5930) 850,5930 850,5900 ccw(c950,5900) 950,5800 TP10.1@1350,5800 1525,5800 cw(c1525,5700) 1625,5700 1625,3925 cw(c1550,3925) 1550,3850 1025,3850 ccw(c1025,3750) 925,3750 925,3244.29 cw(c825,3244.29) 825,3144.29 725,3144.29 725,2875 cw(c625,2875) 625,2775 R4.1@436.02,2775
NetDZ10_1: DZ10.1 DZ11.1 | length 375
  CAPA1 w20: DZ10.1@1625,3305.71 DZ11.1@2000,3305.71
NetDZ10_2: DZ10.2 Q5.4 R5.2 RG11.2 TP13.1 | length 4770.3
  CAPA1 w20: R5.2@1588.98,2775 1588.98,3088.98 cw(c1625,3088.98) 1625,3125 ccw(c1725,3125) 1725,3025 2240.94,3025 ccw(c2240.94,3125) 2340.94,3125 2340.94,3250 2340.94,3434.06 ccw(c2275,3434.06) 2275,3500 2250,3500 cw(c2250,3575) 2175,3575 2175,4880 cw(c2275,4880) 2275,4980 Q5.4@2920,4980 3625,4980 ccw(c3625,5080) 3725,5080 TP13.1@3725,5125
NetDZ12_1: DZ12.1 DZ13.1 | length 375
  CAPA1 w20: DZ12.1@2875,3305.71 DZ13.1@3250,3305.71
NetDZ12_2: DZ12.2 Q6.4 R6.2 RG12.2 TP15.1 | length 6428.3
  CAPA1 w20: DZ12.2@2875,3144.29 2844.29,3144.29 ccw(c2844.29,3125) 2833.23,3140.8 2828.49,3136.06 ccw(c2844.29,3125) 2825,3125 R6.2@2825,2775 ccw(c2925,2775) 2925,2675 3250,2675 ccw(c3250,2775) 3350,2775 3350,3000 cw(c3425,3000) 3425,3075 3500,3075 ccw(c3500,3175) 3600,3175 3600,3250 3600,3425 cw(c3700,3425) 3700,3525 3900,3525 ccw(c3900,3625) 4000,3625 4000,6300 ccw(c3900,6300) 3900,6400 TP15.1@3725,6400 3040,6400 ccw(c3040,6300) 2940,6300 Q6.4@2940,6110
NetDZ13_2: DZ13.2 Q6.3 R6.1 TP16.1 | length 4890.4
  CAPA1 w20: Q6.3@2940,6010 3625,6010 cw(c3625,5910) 3725,5910 TP16.1@3725,5875 3800,5875 cw(c3800,5775) 3900,5775 3900,3750 cw(c3800,3750) 3800,3650 3475,3650 ccw(c3475,3550) 3375,3550 3375,3244.29 cw(c3275,3244.29) 3275,3144.29 3250,3144.29 3250,2875 cw(c3150,2875) 3150,2775 R6.1@2947.05,2775
NetGD1_6: GD1.6 GD1.7 RG3.1 | length 1473.2
  CAPA1 w20: GD1.7@-3275,2425 GD1.6@-3175,2425 -3175,2850 cw(c-3075,2850) -3075,2950 -2640.94,2950 ccw(c-2640.94,3050) -2540.94,3050 RG3.1@-2540.94,3250
NetGD2_6: GD2.6 GD2.7 RG4.1 | length 1440.7
  CAPA1 w20: GD2.7@-2075,2475 GD2.6@-1975,2475 ; -1975,2550 -1975,2450 -1975,2525 cw(c-1875,2525) -1875,2625 -1850,2625 ccw(c-1850,2725) -1750,2725 -1750,2900 cw(c-1675,2900) -1675,2975 -1450,2975 ccw(c-1450,3034.06) -1390.94,3034.06 RG4.1@-1390.94,3250
NetGD3_6: GD3.6 GD3.7 RG7.1 | length 1412.1
  CAPA1 w20: GD3.7@-850,2450 GD3.6@-750,2450 ; -750,2425 -750,2500 cw(c-675,2500) -675,2575 -525,2575 ccw(c-525,2675) -425,2675 -425,2925 cw(c-400,2925) -400,2950 -225,2950 ccw(c-225,3034.06) -140.94,3034.06 RG7.1@-140.94,3250
NetGD4_6: GD4.6 GD4.7 RG8.1 | length 1427.9
  CAPA1 w20: GD4.7@400,2425 GD4.6@500,2425 500,2500 cw(c575,2500) 575,2575 725,2575 ccw(c725,2725) 875,2725 875,2900 cw(c1000,2900) 1000,3025 1100,3025 ccw(c1100,3118.11) 1193.11,3118.11 RG8.1@1193.11,3250
NetGD5_6: GD5.6 GD5.7 RG11.1 | length 1451.6
  CAPA1 w20: 1675,2400 1775,2400 ccw(c1775,2425) 1800,2425 1800,2500 cw(c1875,2500) 1875,2575 2025,2575 ccw(c2025,2675) 2125,2675 2125,2850 cw(c2200,2850) 2200,2925 2309.06,2925 ccw(c2309.06,3075) 2459.06,3075 RG11.1@2459.06,3250
NetGD6_6: GD6.6 GD6.7 RG12.1 | length 1471.4
  CAPA1 w20: 2925,2400 3025,2400 ccw(c3025,2450) 3075,2450 3075,2525 cw(c3150,2525) 3150,2600 3350,2600 ccw(c3350,2700) 3450,2700 3450,2900 cw(c3525,2900) 3525,2975 3618.11,2975 ccw(c3618.11,3075) 3718.11,3075 RG12.1@3718.11,3250
NetINVERSOR1_4: INVERSOR1.4 INVERSOR2.2 | length 692.7
  CAPA1 w9: v1(-2900,1275) -2886.69,1275 ccw(c-2886.69,1292.01) INVERSOR1.4@-2869.69,1292.01 ; v1(-2850,1725) INVERSOR2.2@-2850,1792.01
  Capa2 w9: v1(-2900,1275) -2925,1275 cw(c-2925,1325) -2975,1325 -2975,1400 cw(c-2925,1400) -2925,1450 -2900,1450 ccw(c-2900,1500) -2850,1500 v1(-2850,1725)
NetINVERSOR4_4: INVERSOR4.4 INVERSOR5.2 | length 1227.7
  CAPA1 w9: INVERSOR4.4@-444.68,1284.02 -509.02,1284.02 cw(c-509.02,1350) -575,1350 -575,1550 cw(c-475,1550) -475,1650 -350,1650 ccw(c-350,1750) -250,1750 -250,1925 ccw(c-275,1925) -275,1950 -375,1950 ccw(c-375,1925) -400,1925 INVERSOR5.2@-400,1857.99
NetINVERSOR7_4: INVERSOR7.4 INVERSOR8.2 | length 1140
  CAPA1 w9.02: 2000,1300 ccw(c2007.99,1300) 2007.99,1292.01 INVERSOR7.4@2080.32,1292.01 ; INVERSOR8.2@2100,1807.99 2100,1850
  CAPA1 w20: 2000,1300 2000,1370.44 ccw(c1980,1370.38) 1996.73,1381.34 cw(c2025,1400) 1996.74,1418.67 ccw(c1980,1429.62) 2000,1429.56 2000,1471.82 cw(c2020,1471.76) 2004.78,1484.73 ccw(c1979.05,1506.77) 2004.76,1528.82 cw(c2020,1541.77) 2000,1541.71 2000,1550 cw(c2100,1550) 2100,1650 2225,1650 ccw(c2225,1700) 2275,1700 2275,1850 ccw(c2225,1850) 2225,1900 2125,1900 ccw(c2125,1875) 2100,1875 2100,1850
NetJ1_1: J1.1 Q1.2 Q2.1 TP5.1
NetJ2_1: J2.1 Q3.2 Q4.1 TP6.1
NetJ3_1: J3.1 Q5.2 Q6.1 TP18.1 | length 1342.1
  CAPA1 w20: Q5.2@2920,4780 3350,4780 cw(c3350,4680) 3450,4680 TP18.1@3450,3925
PGND: C1.2 C2.2 C3.2 Csnu1.1 Csnu2.1 Csnu3.1 HS1.1 HS1.2 HS2.1 HS2.2 HS3.1 HS3.2 J4.1 J7.1 J8.1 Q2.2 Q4.2 Q6.2 TP11.1 TP17.1 TRACO2.5 TRACO4.5 TRACO6.5
copper on no net: | length 37343.8
  GND w10: -4075,725 -2975,-375 3389.93,-375 4525,760.07 4525,10075 3875,10725 -3225,10725 -3450,10725 -4075,10100 -4075,725

## Polygon pours and split planes (outlines as drawn)
GND on GND "GND" (solid, remove dead copper, pour order 21): 3875,675 4100,675 ccw(c4100,775) 4200,775 4200,2225 ccw(c4100,2225) 4100,2325 -3625,2325 ccw(c-3625,2225) -3725,2225 -3725,825 ccw(c-3625,825) -3625,725 -1675,725 cw(c-1675,625) -1575,625 -1575,225 ccw(c-1475,225) -1475,125 1925,125 ccw(c1925,225) 2025,225 2025,575 cw(c2125,575) 2125,675
PGND on GND "PGND" (solid, remove dead copper, pour order 22): -3525,2450 cw(c-3575,2450) -3575,2400 -3675,2400 cw(c-3675,2450) -3725,2450 -3725,9925 cw(c-3625,9925) -3625,10025 4100,10025 cw(c4100,9925) 4200,9925 4200,2475 cw(c4100,2475) 4100,2375 2725,2375 cw(c2725,2475) 2625,2475 2625,3475 ccw(c2525,3475) 2525,3575 2400,3575 cw(c2400,3650) 2325,3650 2325,4625 cw(c2375,4625) 2375,4675 3025,4675 ccw(c3025,4775) 3125,4775 3125,5125 ccw(c3025,5125) 3025,5225 2000,5225 ccw(c2000,5125) 1900,5125 1900,3625 cw(c1850,3625) 1850,3575 1525,3575 ccw(c1525,3478.8) 1428.79,3478.79 1428.79,2475 cw(c1328.8,2475) 1328.79,2375 200,2375 cw(c200,2475) 100,2475 100,3525 ccw(c25,3525) 25,3600 -100,3600 cw(c-100,3700) -200,3700 -200,4650 cw(c-150,4650) -150,4700 525,4700 ccw(c525,4775) 600,4775 600,5150 ccw(c500,5150) 500,5250 -550,5250 ccw(c-550,5150) -650,5150 -650,3650 cw(c-675,3650) -675,3625 -1025,3625 ccw(c-1025,3525) -1125,3525 -1125,2525 cw(c-1225,2525) -1225,2425 -2225,2425 cw(c-2225,2525) -2325,2525 -2325,3475 ccw(c-2425,3475) -2425,3575 -2600,3575 cw(c-2600,3625) -2650,3625 -2650,4625 cw(c-2600,4625) -2600,4675 -1950,4675 ccw(c-1950,4775) -1850,4775 -1850,5125 ccw(c-1950,5125) -1950,5225 -3000,5225 ccw(c-3000,5125) -3100,5125 -3100,3674.85 cw(c-3200,3675) -3200,3575 -3475,3575 ccw(c-3475,3525) -3525,3525
GND_G5 on GND "GND_G5" (solid, remove dead copper, pour order 20): 2275,3625 ccw(c2375,3625) 2375,3525 2500,3525 cw(c2500,3450) 2575,3450 2575,2475 cw(c2475,2475) 2475,2375 1575,2375 cw(c1575,2475) 1475,2475 1475,3450 cw(c1550,3450) 1550,3525 1875,3525 ccw(c1875,3600) 1950,3600 1950,5075 cw(c2050,5075) 2050,5175 2975,5175 cw(c2975,5075) 3075,5075 3075,4800 cw(c3000,4800) 3000,4725 2375,4725 ccw(c2375,4625) 2275,4625
GND_G3 on GND "3" (solid, remove dead copper, pour order 19): -250,3650 ccw(c-150,3650) -150,3550 -25,3550 cw(c-25,3475) 50,3475 50,2500 cw(c-50,2500) -50,2400 -950,2400 cw(c-950,2500) -1050,2500 -1050,3475 cw(c-975,3475) -975,3550 -650,3550 ccw(c-650,3625) -575,3625 -575,5100 cw(c-475,5100) -475,5200 450,5200 cw(c450,5100) 550,5100 550,4825 cw(c475,4825) 475,4750 -150,4750 ccw(c-150,4650) -250,4650
GND_G1 on GND "GND_G1" (solid, remove dead copper, pour order 17): -2700,3625 ccw(c-2600,3625) -2600,3525 -2475,3525 cw(c-2475,3450) -2400,3450 -2400,2475 cw(c-2500,2475) -2500,2375 -3400,2375 cw(c-3400,2475) -3500,2475 -3500,3450 cw(c-3425,3450) -3425,3525 -3100,3525 ccw(c-3100,3600) -3025,3600 -3025,5075 cw(c-2925,5075) -2925,5175 -2000,5175 cw(c-2000,5075) -1900,5075 -1900,4800 cw(c-1975,4800) -1975,4725 -2600,4725 ccw(c-2600,4625) -2700,4625
no net on GND "GND" (solid, remove dead copper, pour order 3): -3475,2325 -3475,2375
NetJ3_1 on Capa2 "GND" (solid, remove dead copper, pour order 27): 3200,5325 ccw(c3200,5225) 3100,5225 3100,4850 cw(c3000,4850) 3000,4750 1800,4750 cw(c1800,4850) 1700,4850 1700,7525 cw(c1800,7525) 1800,7625 4000,7625 cw(c4000,7525) 4100,7525 4100,5400 cw(c4025,5400) 4025,5325
NetJ2_1 on Capa2 "GND" (solid, remove dead copper, pour order 26): -1250,7800 ccw(c-1250,7700) -1350,7700 -1350,5350 ccw(c-1250,5350) -1250,5250 -975,5250 cw(c-975,5150) -875,5150 -875,4825 ccw(c-825,4825) -825,4775 400,4775 ccw(c400,4850) 475,4850 475,7700 ccw(c375,7700) 375,7800
NetJ1_1 on Capa2 "GND" (solid, remove dead copper, pour order 25): -3375,7825 ccw(c-3375,7725) -3475,7725 -3475,6000 ccw(c-3375,6000) -3375,5900 -2825,5900 cw(c-2825,5800) -2725,5800 -2725,5700 -2725,4900 ccw(c-2625,4900) -2625,4800 -1975,4800 ccw(c-1975,4900) -1875,4900 -1875,5225 cw(c-1850,5225) -1850,5250 -1600,5250 -1525,5250 ccw(c-1525,5350) -1425,5350 -1425,5425 -1425,7725 ccw(c-1525,7725) -1525,7825
NetC1_1 on Capa2 "GND" (solid, remove dead copper, pour order 24): 3675,5225 3275,5225 ccw(c3275,5125) 3175,5125 3175,4775 cw(c3075,4775) 3075,4675 2975,4675.26 1675,4675 cw(c1675,4725) 1625,4725 1625,7600 cw(c1725,7600) 1725,7700 4000,7700 ccw(c4000,7800) 4100,7800 4100,9650 ccw(c4000,9650) 4000,9750 -3400,9750 ccw(c-3400,9650) -3500,9650 -3500,8000 ccw(c-3400,8000) -3400,7900 450,7900 cw(c450,7800) 550,7800 550,4800 cw(c450,4800) 450,4700 -850,4700 cw(c-850,4800) -950,4800 -950,5075 ccw(c-1050,5075) -1050,5175 -1700,5175 ccw(c-1700,5075) -1800,5075 -1800,4825 cw(c-1900,4825) -1900,4725 -2675,4725 cw(c-2675,4825) -2775,4825 -2775,5700 ccw(c-2875,5700) -2875,5800 -3600,5800 ccw(c-3600,5700) -3700,5700 -3700,3850 ccw(c-3600,3850) -3600,3750 3575,3750 cw(c3575,3725) 3600,3725 4048.97,3725 ccw(c4048.98,3825) 4148.97,3825 4148.97,5157.72 4150,5150 ccw(c4075,5150) 4075,5225
+5V on VCC "GND" (solid, remove dead copper, pour order 10): -3500,1975 -3450,2025 -2825,2025 -2750,2100 -2750,2225 -2725,2250 -2650,2250 -2625,2225 -2625,2100 -2550,2025 -1625,2025 -1575,2075 -1575,2200 -1525,2250 -1475,2250 -1425,2200 -1425,2075 -1375,2025 -400,2025 -350,2075 -350,2200 -300,2250 -250,2250 -200,2200 -200,2075 -175,2025 -100,2025 850,2025 925,2100 925,2225 950,2250 1000,2250 1025,2225 1025,2100 1100,2025 2100,2025 2175,2100 2175,2200 2225,2250 2275,2250 2325,2200 2325,2100 2400,2025 3375,2025 3450,2075 3450,2200 3500,2250 3550,2250 3600,2200 3600,2075 3675,2025 3775,2025 3900,1875 3900,1250 3800,1150 -225,1150 -300,1075 -300,-25 -350,-75 -450,-75 -500,-25 -500,1075 -575,1150 -3400,1150 -3500,1250

## Silkscreen, mask and mechanical layers (free items; w line width, h text height)
Top Overlay:
  drawing of 9 lines, arcs and shapes, not listed
  text "PGND" at 3710,8710 h60
  text "Va" at -2135,7490 h80
  text "Vb" at -1385,7490 h80
  text "Vo1" at 3785,7435.01 h60
  text "Vin= 120 V" at -760,7423.33 h70.87
  text "Vo= 50 V" at -760,7281.67 h70.87
  text "Io= 25 A" at -760,7140 h70.87
  text "Vo2" at 3785,6935.01 h60
  text "PGND" at -3565,4510 h60
  text "Revisado por:" at -3640,586.66 h80
  text "Dr. Mauricio Espinoza B." at -3640,439.99 h90
  text "Mauricio.espinoza_bola@ucr.ac.cr" at -2800,325 h80
  text "Creado por:" at -2790,136.66 h80
  text "Jasiel Carranza A." at -2815,-15 h110
  text "Olman.carranza@ucr.ac.cr" at -1500,-100 h80
  text "CICLADOR DE BATERIAS" at 935,-115 h120
  text "Pamela Barquero U." at -2790,-253.35 h110
  text "2021" at 3060,-265 h60
  text "Pamela.barqueroumana@ucr.ac.cr" at -1750,-325 h80

## Text inside footprints (layer, text, board x,y; h text height)
C1: Top Overlay "+" at -2025,7796.22 h60 r90
C2: Top Overlay "+" at 2375,7797.2 h60 r90
C3: Top Overlay "+" at 175,7797.2 h60 r90
Q1: Mechanical 13 "TAB" at -2135.14,4781.25 h25 r90
Q2: Mechanical 13 "TAB" at -2135.14,5956.25 h25 r90
Q3: Mechanical 13 "TAB" at 239.86,4806.25 h25 r90
Q4: Mechanical 13 "TAB" at 239.86,5931.25 h25 r90
Q5: Mechanical 13 "TAB" at 2834.86,4761.25 h25 r90
Q6: Mechanical 13 "TAB" at 2839.86,5881.25 h25 r90